# Altium PCB Mach_nap_HEALA.PcbDoc
Units mm, origin at the board's own origin, x right, y up, seen from the top; angles counter-clockwise.
Board outline 30 x 30 mm, 2 copper layers (Top Layer, Bottom Layer); 14 components, 14 nets, 60 pads, 6 vias.
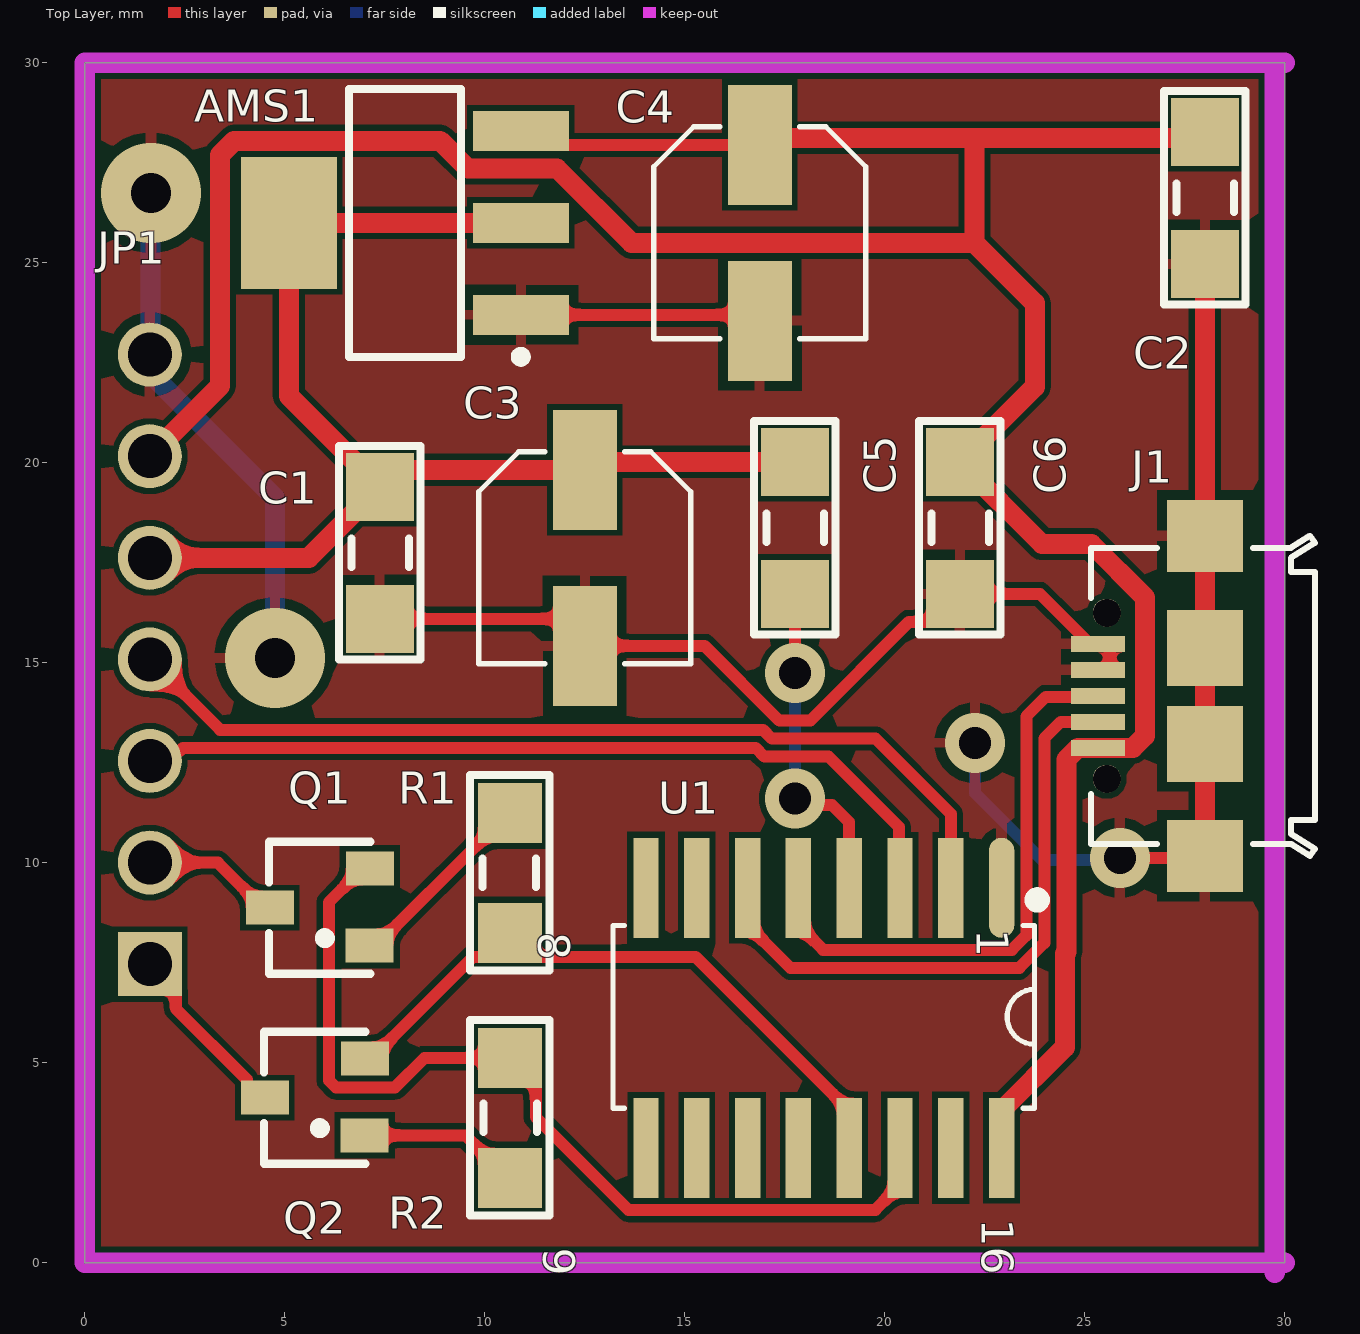
[diagram p0: Top Layer view]
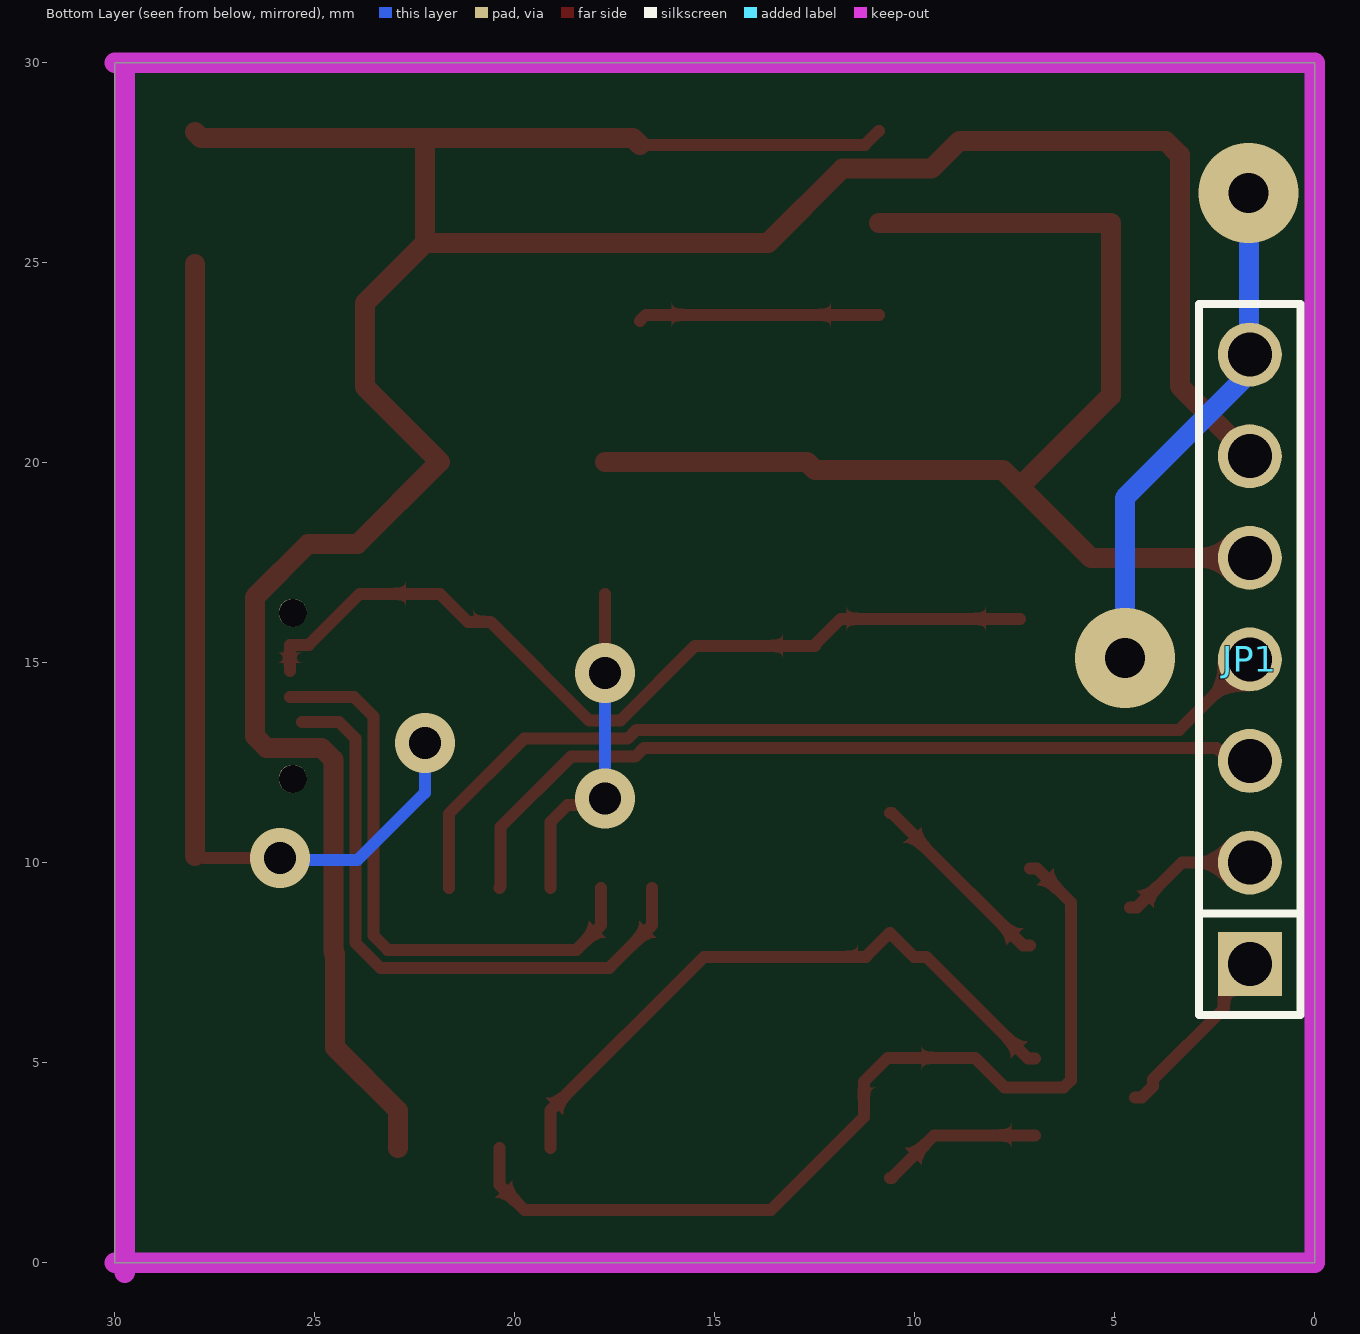
[diagram p1: Bottom Layer view, seen from below]
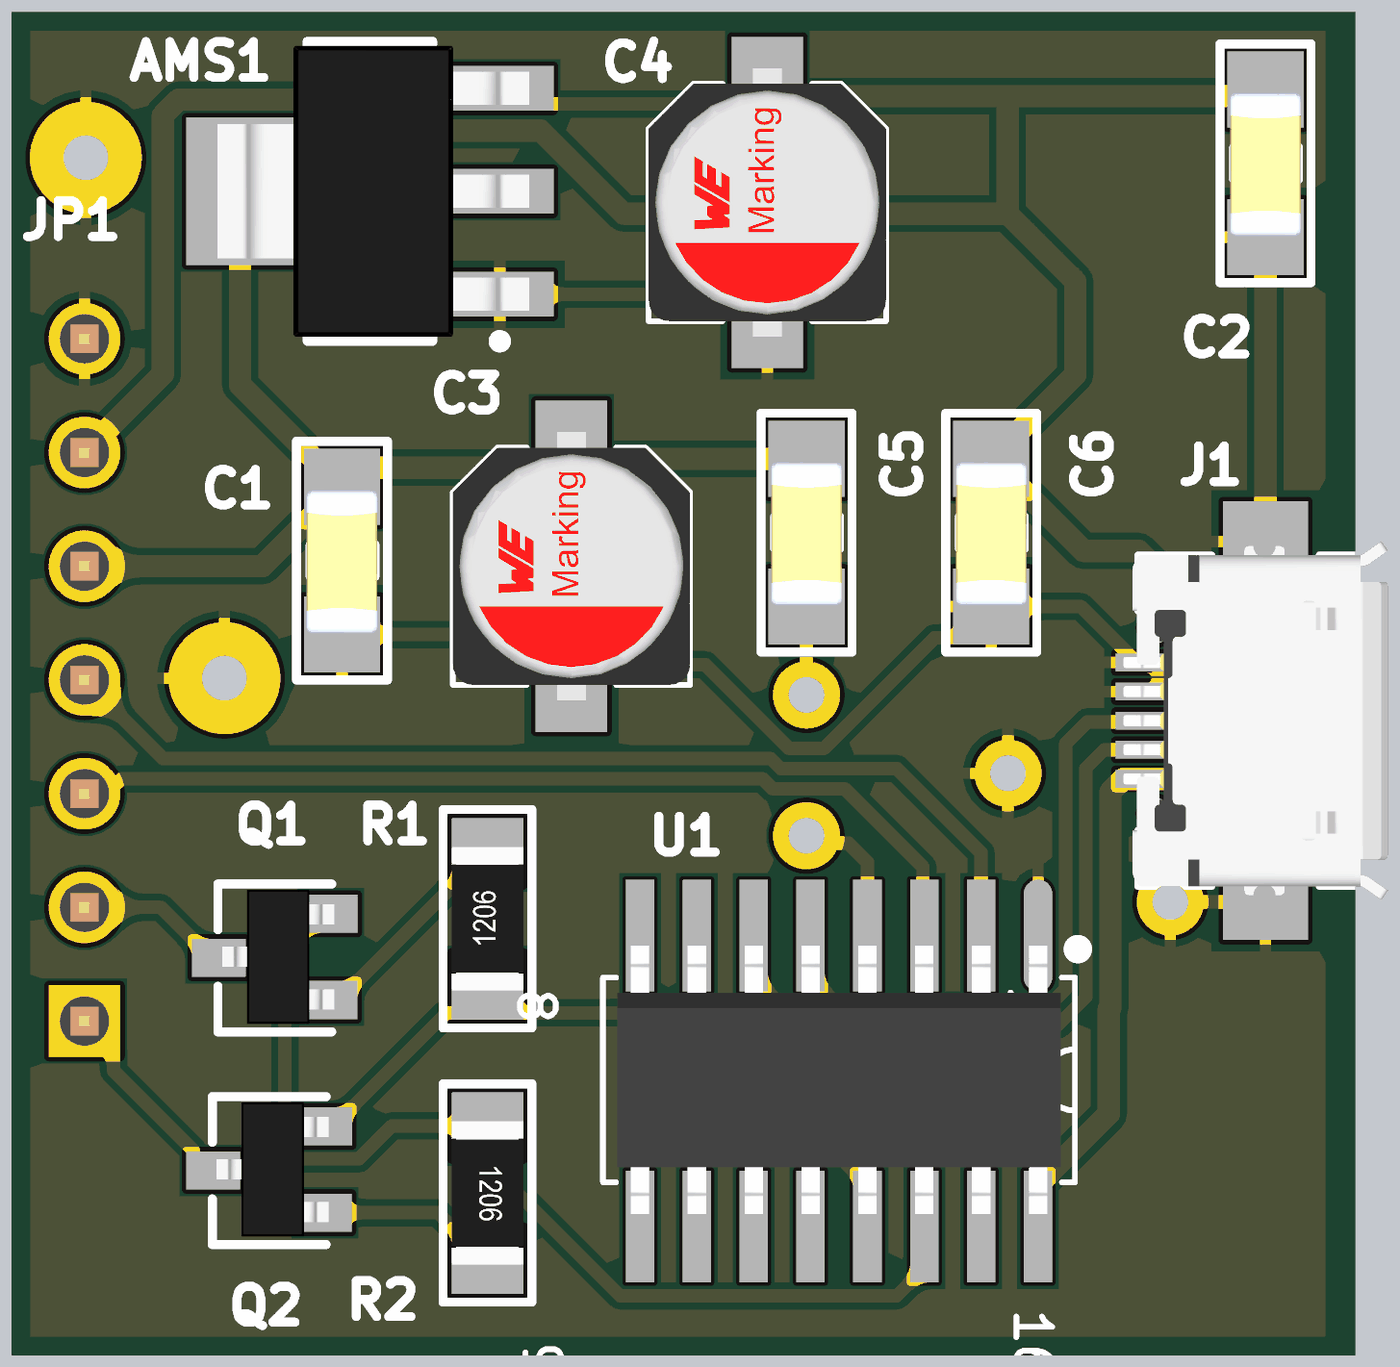
[diagram p2: 3D render of the assembled board from above, using the file's embedded part models]

## Layer stack, top to bottom
Top Solder: solder mask 0.0102, Solder Resist, Dk 3.5
Top Layer: signal copper 0.0356
Dielectric 1: dielectric 0.32, FR-4, Dk 4.8
Bottom Layer: signal copper 0.0356
Bottom Solder: solder mask 0.0102, Solder Resist, Dk 3.5

## Board outline
0,0 30,0 30,30 0,30

## Design rules (kind name [scope] priority, off if disabled: settings)
Clearance [All] p1: gap=0.15 ignorepadtopadclearanceinfootprint=TRUE
PolygonConnect [All] p1: connectstyle=Relief reliefconductorwidth=0.254 reliefentries=4 polygonreliefangle="90 Angle" airgapwidth=0.254
RoutingVias RoutingVias_1 [All] p1: holewidth=0.711 width=1.27 viastyle="Through Hole" minholewidth=0.6 minwidth=0.8 maxholewidth=0.711 maxwidth=1.27
RoutingVias [All] p2: holewidth=0.711 width=1.27 viastyle="Through Hole" minholewidth=0.711 minwidth=1.27 maxholewidth=0.711 maxwidth=1.27
SolderMaskExpansion [All] p1: expansion=0.102 istentingtop=FALSE
SupplyNets "Schematic Supply Nets_2" [InNet('3.3V')] p1: voltage=0.000
SupplyNets "Schematic Supply Nets_1" [InNet('5V')] p2: voltage=0.000
SupplyNets "Schematic Supply Nets" [InNet('GND')] p3: voltage=0.000
Width [All] p1: maxlimit=1 minlimit=0.3 preferedwidth=0.5 minimp=50.000000 maximp=50.000000 favimp=50.000000
30 further rules are at their usual default settings.

## Components (designator, comment, footprint, x,y, rotation, side; value= is the part's Value field where it differs from the comment)
AMS1 "AMS1117-3.3V" SOT223 8,26 r90 top value="AMS1117-3.3V SOT223"
C1 "100n" "tu 1206" 7.375,17.75 r270 top
C2 "100n" "tu 1206" 28,26.625 r270 top
C3 "10u" CAP-ALU-SMD-5x5.5x1.4 12.5,17.625 r270 top
C4 "10u" CAP-ALU-SMD-5x5.5x1.4 16.875,25.75 r270 top
C5 "106" "tu 1206" 17.75,18.375 r270 top
C6 "106" "tu 1206" 21.875,18.375 r270 top
J1 "Micro USB 2.0 Type B" 629105136821 28,14.175 r90 top
JP1 "JP 1x7 2.54" "JP 1x7 DT" 1.625,7.465 r90 bottom
Q1 "BC817" SOT-23 5.875,8.875 r90 top value=C9014
Q2 "BC817" SOT-23 5.75,4.125 r90 top value=C9014
R1 "10k" "tro smd 1206" 10.625,9.75 r90 top
R2 "10k" "tro smd 1206" 10.625,3.625 r270 top
U1 "CH340C" SOIC16_50_284_25X90_SMT 18.5,6.125 r270 top

## Footprints (in the part's own frame and the unit in brackets; to place one, negate y for a bottom-side part, rotate by r counter-clockwise, add the part's x,y. Pads: shape width x height; smd on the part's side, far side on the other; paste and mask are expansions set on the pad)
629105136821 [mm] "Micro USB 2.0 SMT Type B Horizontal 5 Contacts"
  rect 0.4x1.35 smd: 1(-1.3,2.675) 2(-0.65,2.675) 3(0,2.675) 4(0.65,2.675) 5(1.3,2.675)
  round 0.7 hole 0.7 unplated: M1(-2.075,2.45) M2(2.075,2.45)
  rect 1.8x1.9 smd: S1(-4,0) S4(4,0)
  rect 1.9x1.9 smd: S2(-1.2,0) S3(1.2,0)
  silkscreen extent -4,-2.75 4,2.85, body extent -4,-2.73 4,3.17, height 2.77
CAP-ALU-SMD-5x5.5x1.4 [mm]
  rect 3x1.6 smd: 1(-2.2,0) 2(2.2,0)
  silkscreen extent -2.65,-2.65 2.65,2.65, body extent -3,-2.65 3,2.65, height 5.45
"JP 1x7 DT" [mm] "7 pins, 1 row, straight, gold plating"
  rect 1.6x1.6 hole 1.1: 1(0,0)
  round 1.6 hole 1.1: 2(2.54,0) 3(5.08,0) 4(7.62,0) 5(10.16,0) 6(12.7,0) 7(15.24,0)
  silkscreen extent -1.27,-1.27 16.51,1.27, body extent -1.27,-1.27 16.51,1.27, height 8.54
SOIC16_50_284_25X90_SMT [mm]
  oval 2.5x0.635 smd mask+0.076: 1(-3.25,4.42)
  rect 2.5x0.635 smd mask+0.076: 2(-3.25,3.15) 3(-3.25,1.88) 4(-3.25,0.61) 5(-3.25,-0.66) 6(-3.25,-1.93) 7(-3.25,-3.2) 8(-3.25,-4.47) 9(3.25,-4.47) 10(3.25,-3.2) 11(3.25,-1.93) 12(3.25,-0.66) 13(3.25,0.61) 14(3.25,1.88) 15(3.25,3.15) 16(3.25,4.42)
  silkscreen extent -3.07,-5.3 2.26,5.44, body extent -3.02,-4.97 2.98,4.93, height 1.4
SOT223 [mm]
  rect 1x2.4 smd: 1(-2.3,-2.9) 2(0,-2.9) 3(2.3,-2.9)
  rect 3.3x2.4 smd: 4(0,2.9)
  silkscreen extent -3.47,-3.03 3.35,1.4, body extent -3.25,-3.56 3.25,3.4, height 1.68
SOT-23 [mm] "SOT 23 _ 1-3-2"
  rect 0.85x1.2 smd: 1(-0.94,-1.245) 2(0.985,-1.25) 3(0.005,1.25)
  silkscreen extent -1.65,-1.27 1.65,1.27, body extent -1.47,-1.33 1.53,1.17, height 1.06
"tro smd 1206" [mm]
  rect 1.5x1.6 smd: 1(-1.5,0) 2(1.5,0)
  silkscreen extent -2.44,-0.99 2.44,0.99, body extent -1.6,-0.8 1.6,0.8, height 0.6
"tu 1206" [mm]
  rect 1.7x1.7 smd: 1(-1.65,0) 2(1.65,0)
  silkscreen extent -2.67,-1.02 2.67,1.02, body extent -1.57,-0.8 1.63,0.8, height 0.94

## Part data
AMS1: library part "AMS1117 SMD", "Dán", Chung_Loai=Dán, Don_Vi=Con, Ma_Hang=MH000596
C1 C2 C5 C6: library part "Tu 1206 106 16V 20%", "Dán", Chung_Loai=Dán, Don_Vi=Con, Ma_Hang=MH004541, So_Chan=2, Ten_Linh_Kien="Tụ 1206 106-10uF 20% 16V"
C3 C4: library part CN-SMD, "Polarized Capacitor (Axial)", LatestRevisionDate=17-Jul-2002, LatestRevisionNote="Re-released for DXP Platform.", PackageReference=POLAR0.8, Published=8-Jun-2000, Publisher="Altium Limited"
J1: library part 629105136821, "Micro USB 2.0 Type B Horizontal SMT 5 Contacts WR-COM", Operating Temperature="-40 to 85 degC", Rated Current="1 A", ComponentLink1Description=Manufacturer, ComponentLink1URL=http://www.we-online.de, ComponentLink2Description=Datasheet, ComponentLink2URL=http://katalog.we-online.de/em/datasheet/629105136821.pdf, Gender=Female, Interface Type="Micro USB 2.0 Type B", Mounting Technology=SMT, Orientation=Horizontal, Packaging="Tape and Reel", Part Number=629105136821, Published Date="May 2018", Publisher="Wurth Elektronik"
JP1: library part "JP 1x7 2.54 Duc Thang", "Cắm", Chung_Loai=Cắm, Don_Vi=Con, Ma_Hang=MH000903, Ten_Linh_Kien="Jump Đơn Đực 2.54MM 1x40P Thẳng 11MM"
Q1 Q2: library part "Trans BC817", "SOT-23 - C8658"
R1 R2: library part "Tro 1206 5% 10k", "Dán", Chung_Loai=Dán, Don_Vi=Con, Ma_Hang=MH005909, So_Chan=2, Ten_Linh_Kien="Trở 1206 5% 10K"
U1: "USB Bridge, USB to UART USB 2.0 UART Interface", Alternate Part Number-1=NA, Case/Package=SOIC16, Manufacturer=Olimex, Supplier Part Number-1=C84681, Manufacturer Part Number=CH340C, Supplier-1=LCSC

## Via types
v1: diameter 1.5, hole 0.8, Top Layer to Bottom Layer, 4 vias
v2: diameter 2.5, hole 1, Top Layer to Bottom Layer, 2 vias

## Nets (pads, with @x,y where several pads share a name; then routed paths per layer and width w, separated by ;. In a path a pad name is that pad's centre, name@x,y a point inside that pad or via, vN(x,y) a via of type N, cw(c..) or ccw(c..) an arc to the next point about the centre after c; other vN are vias at no path point)
3.3V: AMS1.2 AMS1.4 C1.1 C3.1 C5.1 JP1.5 | length 30.5
  Top Layer w0.5: JP1.5 5.6,17.625 C1.1 ; AMS1.2 AMS1.4 5.1,21.675 C1.1 ; C5.1 12.7,20.025 C3.1 7.8,19.825 C1.1
5V: AMS1.3 C2.1 C4.1 C6.1 J1.1 JP1.6 U1.16 | length 77.3
  Top Layer w0.3: AMS1.3 11.25,27.95 C4.1
  Top Layer w0.5: JP1.6 3.375,21.915 3.375,27.691 3.734,28.05 8.884,28.05 9.576,27.358 11.808,27.358 13.666,25.5 22.24,25.5 ; C4.1 17.05,28.125 22.25,28.125 ; U1.16 22.92,3.807 24.5,5.387 24.5,7.735 24.538,7.773 24.538,12.582 24.83,12.875 26.207,12.875 26.5,13.168 26.5,16.636 25.168,17.968 23.932,17.968 C6.1 23.75,21.9 23.75,23.99 22.24,25.5 ; C2.1 27.85,28.125 22.25,28.125 ; 22.24,25.5 22.24,28.115 22.25,28.125
D+: J1.3 U1.5 | length 14.8
  Top Layer w0.3: U1.5 17.84,8.443 18.458,7.825 23.176,7.825 23.538,8.187 23.538,13.663 24.025,14.15 J1.3@25.625,14.15
D-: J1.2 U1.6 | length 15.7
  Top Layer w0.3: U1.6 16.57,8.443 17.638,7.375 23.362,7.375 23.988,8 23.988,13.113 24.4,13.525 J1.2
EN: JP1.2 Q1.3 | length 3.5
  Top Layer w0.3: JP1.2 3.325,10.005 4.45,8.88 Q1.3
GND: AMS1.1 C1.2 C2.2 C3.2 C4.2 C6.2 J1.4 J1.5 J1.S1 J1.S2 J1.S3 J1.S4 JP1.7 U1.1 | length 63.1
  Top Layer w0.3: C1.2 11.85,16.1 12.5,15.45 C3.2 15.493,15.425 17.363,13.555 18.137,13.555 20.607,16.025 21.175,16.025 C6.2 23.875,16.725 25.15,15.45 25.625,15.45 J1.4@25.625,14.8 ; AMS1.1 16.725,23.7 C4.2 ; v1(25.875,10.125) J1.S1@27.775,10.125
  Top Layer w0.5: J1.S1 J1.S2 J1.S3 J1.S4 C2.2
  Bottom Layer w0.3: v1(22.25,13) 22.25,11.75 23.936,10.064 25.814,10.064 v1(25.875,10.125)
  Bottom Layer w0.5: v2(1.654,26.75) 1.64,26.736 1.64,22.264 1.625,22.25 4.75,19.125 v2(4.75,15.125)
IO0: JP1.1 Q2.3 | length 4.6
  Top Layer w0.3: JP1.1 2.275,6.815 2.275,6.355 4.05,4.58 4.05,4.405 4.325,4.13 Q2.3
NetC5_2: C5.2 U1.4 | length 8.4
  Top Layer w0.3: v1(17.75,11.605) 17.914,11.441 18.684,11.441 19.11,11.015 U1.4 ; v1(17.75,14.75) C5.2
  Bottom Layer w0.3: v1(17.75,11.605) v1(17.75,14.75)
NetQ1_1: Q1.1 R1.2 | length 4.9
  Top Layer w0.3: Q1.1 7.295,7.935 9.975,10.616 9.975,10.65 10.575,11.25 R1.2
NetQ1_2: Q1.2 R2.1 U1.14 | length 23.7
  Top Layer w0.3: Q1.2 6.95,9.86 6.1,9.01 6.1,4.561 6.276,4.385 7.756,4.385 8.495,5.125 R2.1 ; R2.1@10.675,5.125 11.275,4.525 11.275,3.638 13.588,1.325 19.763,1.325 20.38,1.942 U1.14
NetQ2_1: Q2.1 R2.2 | length 4.1
  Top Layer w0.3: Q2.1 9.515,3.185 10.575,2.125 R2.2
NetQ2_2: Q2.2 R1.1 U1.13 | length 16.2
  Top Layer w0.3: Q2.2 7.175,5.11 9.715,7.65 10.025,7.65 R1.1 11.225,7.65 15.268,7.65 19.11,3.807 U1.13
RXD0: JP1.4 U1.2 | length 23.5
  Top Layer w0.3: JP1.4 3.385,13.325 16.956,13.325 17.176,13.105 19.77,13.105 21.65,11.225 U1.2
TXD0: JP1.3 U1.3 | length 21.2
  Top Layer w0.3: JP1.3 1.874,12.794 2.369,12.794 2.451,12.875 16.77,12.875 16.99,12.655 18.595,12.655 20.351,10.899 20.351,9.404 U1.3
pads on no net: J1.M1 J1.M2 U1.7 U1.8 U1.9 U1.10 U1.11 U1.12 U1.15

## Polygon pours and split planes (outlines as drawn)
GND on Top Layer "GND_L01_P003" (solid, pour order 3): 0,0 30,0 30,30 0,30

## Keep-outs
Keep-Out Layer:
  lines w0.508: 29.75,-0.25 29.75,29.75 ; 30,0 0,0 0,30 30,30

## Text inside footprints (layer, text, board x,y; h text height)
J1: Mechanical 1 "PCB Edge" at 28.975,10.9 h0.8 r90
U1: Top Overlay "16" at 22.43,1.1 h0.8 r270; Top Overlay "9" at 11.466,0.372 h0.8 r270; Top Overlay "8" at 11.343,8.266 h0.8 r270; Top Overlay "1" at 22.303,8.339 h0.8 r270